# Altium PCB ROS_CAR.PcbDoc (part 10 of 13)
Units mil, origin at the board's own origin, x right, y up, seen from the top; angles counter-clockwise.
Board outline 3937.01 x 3937.01 mil, 2 copper layers (Top Layer, Bottom Layer); 201 components, 155 nets, 998 pads, 0 vias.
Unrouted connection lines stored in the file: 3.
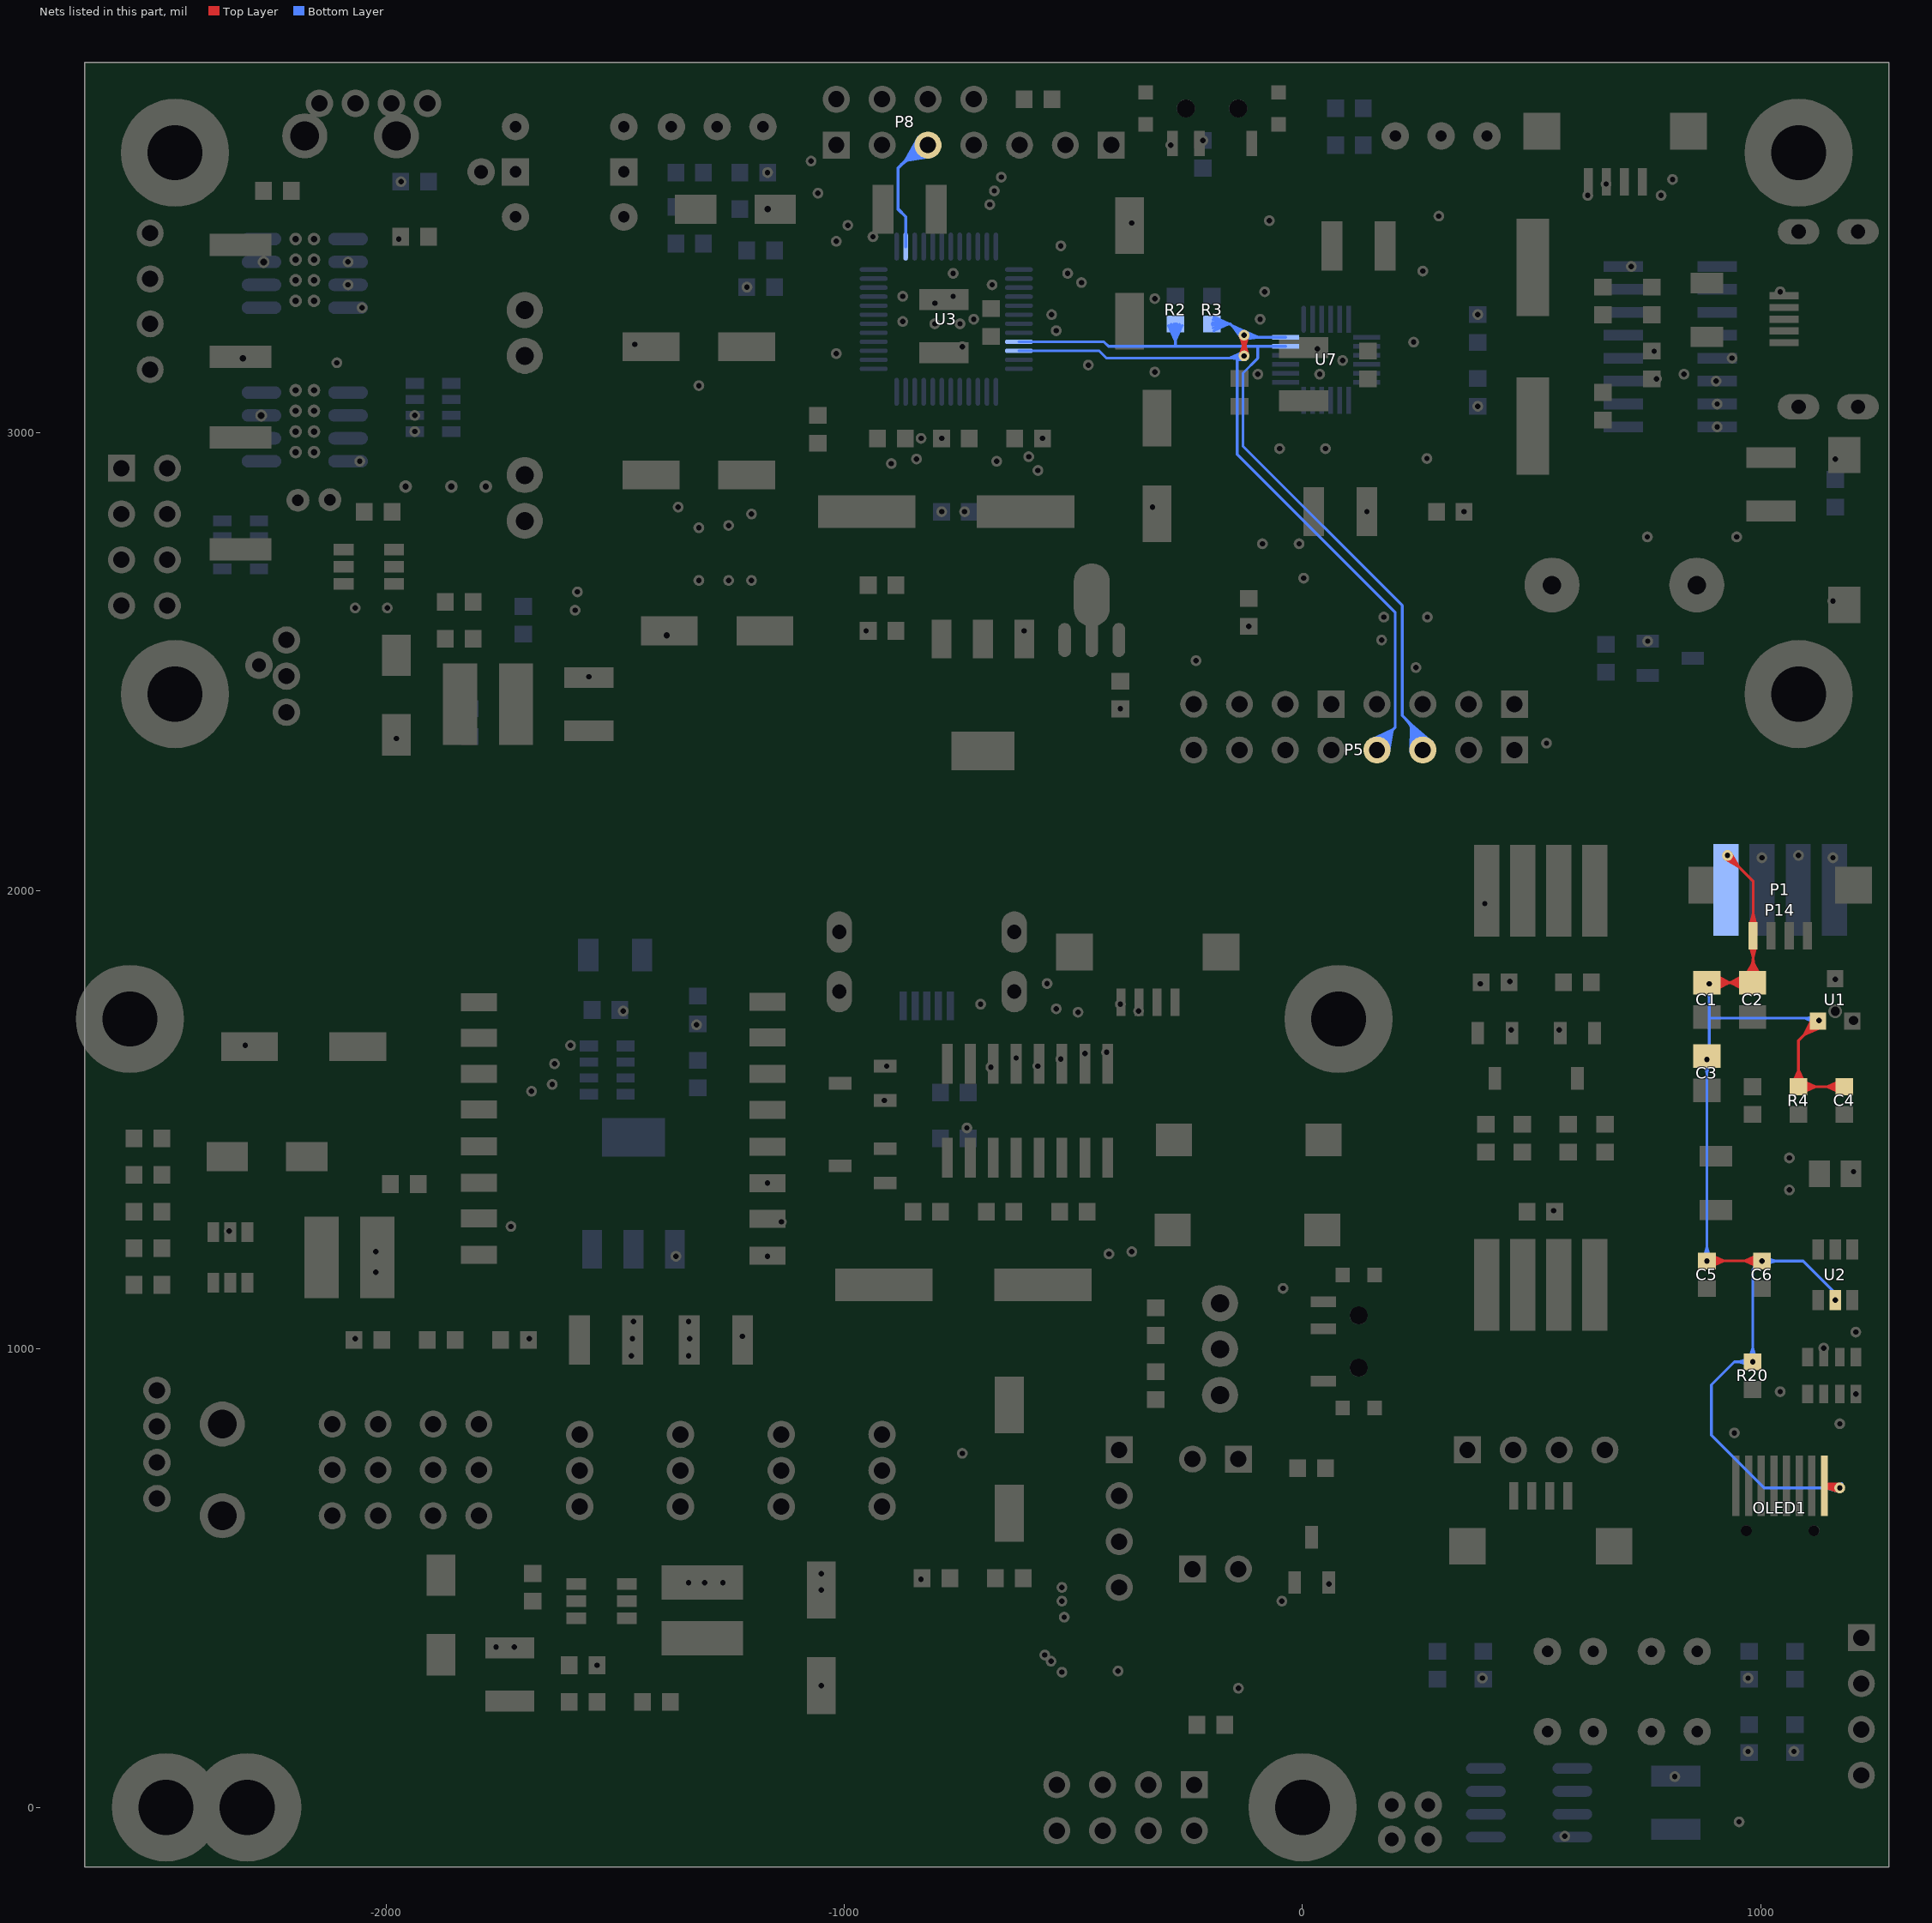
[diagram p10: the nets of this part, all layers, seen from the top]

## Nets (pads, with @x,y where several pads share a name; then routed paths per layer and width w, separated by ;. In a path a pad name is that pad's centre, name@x,y a point inside that pad or via, vN(x,y) a via of type N, cw(c..) or ccw(c..) an arc to the next point about the centre after c; other vN are vias at no path point) (continued)
S_GND: C1.2 C2.2 C3.2 C4.2 C5.1 C6.2 OLED1.8 P1.4 P14.4 pad.1@882.52,1192.09 pad.1@882.52,1632.09 pad.1@887.52,1797.09 pad.1@927.52,2077.09 pad.1@982.52,972.09 pad.1@1002.52,1192.09 pad.1@1127.52,1717.09 pad.1@1162.52,1107.09 pad.1@1172.52,697.09 R4.2 R20.1 U1.3 U2.2 | length 10742
  Top Layer w6: C1.2@879.29,1800.24 C1.2@887.74,1810 ; C1.2@879.66,1793.11 C1.2@889.61,1783.2 ; C5.1@882.52,1192.4 C6.2@1007.2,1192.4 ; C1.2@882.52,1799.49 C2.2@982.52,1799.49 ; C5.1@883.3,1200.86 915.15,1193.63 ; C5.1@883.45,1183.33 914.87,1191.1 ; C5.1@883.5,1192.4 919.81,1192.4 ; C5.1@883.53,1200.84 912.77,1193.04 ; C5.1@883.65,1189.1 919.81,1192.4 ; C5.1@883.65,1195.71 919.81,1192.4 ; C5.1@883.71,1183.36 912.65,1191.75 ; C5.1@883.91,1200.79 912.65,1191.75 ; C5.1@883.98,1200.78 914.87,1191.1 ; C5.1@884.08,1183.41 912.77,1193.04 ; C5.1@884.12,1183.42 915.15,1193.63 ; C5.1@884.7,1183.17 919.81,1192.4 ; C5.1@884.7,1201.63 919.81,1192.4 ; C1.2@886.46,1799.49 930.05,1799.49 ; C5.1@886.73,1177.44 919.81,1192.4 ; C5.1@886.73,1207.36 919.81,1192.4 ; C1.2@886.7,1794.9 930.05,1799.49 ; C1.2@886.7,1804.07 930.05,1799.49 ; C1.2@887.49,1805.9 921.54,1801.6 ; C1.2@887.74,1788.98 930.05,1799.49 ; C1.2@887.75,1805.89 918.64,1800.69 ; C1.2@887.94,1805.89 930.05,1799.49 ; C1.2@888.5,1805.84 917.48,1798.16 ; C1.2@888.67,1788.35 919.32,1796.82 ; C5.1@888.75,1185.86 cw(c904.55,1170.05) 904.55,1192.4 ; C5.1@888.75,1198.32 ccw(c903.03,1212.6) 903.03,1192.4 ; C1.2@888.81,1805.8 919.32,1796.82 ; C1.2@888.92,1788.39 930.05,1799.49 ; C1.2@889.13,1788.42 917.48,1798.16 ; C1.2@889.51,1795.1 cw(c900.1,1784.5) C1.2@900.1,1799.49 ; C1.2@889.61,1815.78 930.05,1799.49 ; C5.1@890.09,1185.82 cw(c905.97,1169.93) 905.97,1192.4 cw(c905.97,1214.87) C5.1@890.09,1198.98 ; C1.2@892.31,1777.67 930.05,1799.49 ; C1.2@892.31,1821.31 930.05,1799.49 ; C1.2@893.75,1790.86 cw(c914.59,1770.02) 914.59,1799.49 ; C1.2@893.75,1803.32 ccw(c902.99,1812.56) C1.2@902.99,1799.49 ; C5.1@894.33,1181.58 cw(c920.46,1155.45) 920.46,1192.4 cw(c920.46,1229.36) C5.1@894.33,1203.23 ; C1.2@895.85,1799.95 C1.2@887.74,1810 ; C1.2@896.2,1795.6 C1.2@889.61,1783.2 ; C1.2@898.19,1787.76 cw(c926.51,1759.44) 926.51,1799.49 cw(c926.51,1839.54) C1.2@898.19,1811.22 ; C1.2@902.43,1783.51 cw(c940.99,1744.95) 940.99,1799.49 cw(c940.99,1854.03) C1.2@902.43,1815.46 ; pad.1@922.13,2070.12 952.06,2052.55 pad.1@934.49,2082.48 ; pad.1@927.52,2068.28 cw(c927.52,2047) 942.56,2062.05 cw(c957.6,2077.09) pad.1@936.33,2077.09 ; pad.1@927.52,2077.09 983.46,2021.14 983.46,1800.43 C2.2@982.52,1799.49 ; C2.2@960.83,1805.81 983.46,1843.09 ; C2.2@962.61,1783.51 ccw(c924.04,1744.95) 924.04,1799.49 ccw(c924.04,1854.03) C2.2@962.61,1815.46 ; C2.2@966.3,1803 983.46,1843.09 ; C2.2@966.55,1815.46 ccw(c925.7,1856.31) 983.46,1856.31 ; C2.2@966.85,1787.76 ccw(c938.53,1759.44) 938.53,1799.49 ccw(c938.53,1839.54) C2.2@966.85,1811.22 ; C2.2@970.79,1811.22 ccw(c940.19,1841.82) 983.46,1841.82 ; C2.2@972.04,1801 983.46,1843.09 ; C2.2@972.73,1777.67 934.99,1799.49 ; C2.2@972.73,1821.31 934.99,1799.49 ; C2.2@975.03,1806.98 ccw(c954.67,1827.34) 983.46,1827.34 ; C2.2@975.43,1783.2 934.99,1799.49 ; C2.2@975.43,1815.78 934.99,1799.49 ; P14.4@976.67,1881.09 983.46,1854.09 ; P14.4@976.67,1923.08 983.46,1950.09 ; C2.2@977.3,1788.98 934.99,1799.49 ; C2.2@977.3,1810 934.99,1799.49 ; C2.2@977.94,1799.83 983.46,1843.09 ; C2.2@978.34,1794.9 934.99,1799.49 ; C2.2@978.34,1804.07 934.99,1799.49 ; C2.2@978.58,1799.49 934.99,1799.49 ; P14.4@978.63,1877.09 cw(c966.95,1865.41) 983.46,1865.41 cw(c999.98,1865.41) P14.4@988.3,1877.09 ; P14.4@978.63,1927.08 ccw(c966.95,1938.76) 983.46,1938.76 ccw(c999.98,1938.76) P14.4@988.3,1927.08 ; 980.49,1192.4 cw(c980.49,1170.05) C6.2@996.29,1185.86 ; 982.01,1192.4 ccw(c982.01,1212.6) C6.2@996.29,1198.32 ; 983.46,1837.26 ccw(c1020.29,1837.26) C2.2@994.25,1811.22 ; 983.46,1851.75 ccw(c1034.78,1851.75) C2.2@998.49,1815.46 ; P14.4@983.46,1881.93 983.46,1854.09 ; P14.4@983.46,1922.24 983.46,1950.09 ; C2.2@987.11,1799.63 983.46,1843.09 ; P14.4@990.26,1881.09 983.46,1854.09 ; P14.4@990.26,1923.08 983.46,1950.09 ; C6.2@990.71,1181.58 ccw(c964.58,1155.45) 964.58,1192.4 ccw(c964.58,1229.36) C6.2@990.71,1203.23 ; C2.2@993.06,1800.55 983.46,1843.09 ; C6.2@994.95,1185.82 ccw(c979.07,1169.93) 979.07,1192.4 ccw(c979.07,1214.87) C6.2@994.95,1198.98 ; C6.2@998.31,1177.44 965.23,1192.4 ; C6.2@998.31,1207.36 965.23,1192.4 ; C2.2@998.87,1802.29 983.46,1843.09 ; C6.2@1000.34,1183.17 965.23,1192.4 ; C6.2@1000.34,1201.63 965.23,1192.4 ; C6.2@1000.92,1183.42 969.89,1193.63 ; C6.2@1000.96,1183.41 972.26,1193.04 ; C6.2@1001.06,1200.78 970.17,1191.1 ; C6.2@1001.13,1200.79 972.39,1191.75 ; C6.2@1001.33,1183.36 972.39,1191.75 ; C6.2@1001.38,1189.1 965.23,1192.4 ; C6.2@1001.38,1195.71 965.23,1192.4 ; C6.2@1001.54,1192.4 965.23,1192.4 ; C6.2@1001.51,1200.84 972.26,1193.04 ; C6.2@1001.59,1183.33 970.17,1191.1 ; C6.2@1001.74,1200.86 969.89,1193.63 ; C2.2@1004.46,1804.86 983.46,1843.09 ; R4.2@1067.56,1575.63 1082.52,1608.71 ; R4.2@1071.7,1583.23 ccw(c1045.57,1609.36) 1082.52,1609.36 ccw(c1119.47,1609.36) R4.2@1093.34,1583.23 ; R4.2@1073.29,1573.59 1082.52,1608.71 ; R4.2@1075.94,1578.98 ccw(c1060.05,1594.87) 1082.52,1594.87 ccw(c1104.99,1594.87) R4.2@1089.1,1578.98 ; R4.2@1079.22,1572.55 1082.52,1608.71 ; R4.2@1083.5,1572.4 1119.81,1572.4 ; R4.2@1083.65,1569.1 1119.81,1572.4 ; R4.2@1083.65,1575.71 1119.81,1572.4 ; R4.2@1084.7,1563.17 1119.81,1572.4 ; R4.2@1084.7,1581.63 1119.81,1572.4 ; R4.2@1085.82,1572.55 1082.52,1608.71 ; R4.2@1086.73,1557.44 1119.81,1572.4 ; R4.2@1086.73,1587.36 1119.81,1572.4 ; R4.2@1090.09,1565.82 cw(c1105.97,1549.93) 1105.97,1572.4 cw(c1105.97,1594.87) R4.2@1090.09,1578.98 ; R4.2@1091.75,1573.59 1082.52,1608.71 ; R4.2@1094.33,1561.58 cw(c1120.46,1535.45) 1120.46,1572.4 cw(c1120.46,1609.36) R4.2@1094.33,1583.23 ; R4.2@1097.48,1575.63 1082.52,1608.71 ; 1098.31,1689.02 cw(c1125.12,1662.22) U1.3@1125.12,1700.13 ; 1100.69,1691.4 ccw(c1077.25,1714.84) U1.3@1110.4,1714.84 ; U1.3@1108.56,1699.27 cw(c1125.12,1682.71) U1.3@1125.12,1706.13 ; U1.3@1110.53,1701.24 cw(c1127.52,1684.25) U1.3@1127.52,1708.28 ; U1.3@1110.93,1701.64 ccw(c1097.73,1714.84) U1.3@1116.4,1714.84 ; U1.3@1113.2,1723.48 1094.67,1685.38 ; U1.3@1113.29,1704 ccw(c1100.19,1717.09) U1.3@1118.71,1717.09 ; U1.3@1118.44,1720.45 1094.67,1685.38 ; U1.3@1120.4,1722.28 1102.62,1690.39 ; U1.3@1120.64,1722.59 1102.75,1693.2 ; U1.3@1120.67,1722.63 1102.55,1693.26 ; U1.3@1120.98,1722.99 1099.92,1693.12 ; U1.3@1125.12,1714.84 1094.67,1685.38 ; U1.3@1125.12,1715.83 1082.52,1673.23 R4.2@1082.52,1572.4 C4.2@1182.52,1572.4 ; U1.3@1130.5,1707.99 1094.67,1685.38 ; U1.3@1132.45,1709.79 1099.92,1693.12 ; U1.3@1132.74,1709.99 1102.55,1693.26 ; U1.3@1132.77,1710.01 1102.75,1693.2 ; U1.3@1133.19,1710.34 1102.62,1690.39 ; U1.3@1133.36,1702.65 1094.67,1685.38 ; OLED1.8@1138.18,701.29 ccw(c1148.33,711.44) 1148.33,697.09 ; OLED1.8@1138.53,697.23 pad.1@1166.76,697.09 ; OLED1.8@1138.98,702.09 pad.1@1166.76,697.09 ; OLED1.8@1140.25,706.79 pad.1@1166.76,697.09 ; OLED1.8@1142.42,705.53 ccw(c1162.81,725.92) pad.1@1162.81,697.09 ; pad.1@1166.29,690.86 ccw(c1151.25,675.82) 1151.25,697.09 ccw(c1151.25,718.36) pad.1@1166.29,703.32 ; pad.1@1168.84,689.08 OLED1.8@1143.27,705.69 ; pad.1@1169.99,688.65 OLED1.8@1142.84,701.39 ; C4.2@1170.71,1561.58 ccw(c1144.58,1535.45) 1144.58,1572.4 ccw(c1144.58,1609.36) C4.2@1170.71,1583.23 ; pad.1@1171.16,705.79 OLED1.8@1143.98,697.09 ; pad.1@1171.25,705.81 OLED1.8@1142.71,697.21 ; pad.1@1172.49,705.9 OLED1.8@1142.84,701.39 ; pad.1@1173.76,705.81 OLED1.8@1143.27,705.69 ; C4.2@1174.95,1565.82 ccw(c1159.07,1549.93) 1159.07,1572.4 ccw(c1159.07,1594.87) C4.2@1174.95,1578.98 ; C4.2@1178.31,1557.44 1145.23,1572.4 ; C4.2@1178.31,1587.36 1145.23,1572.4 ; C4.2@1180.34,1563.17 1145.23,1572.4 ; C4.2@1180.34,1581.63 1145.23,1572.4 ; C4.2@1181.38,1569.1 1145.23,1572.4 ; C4.2@1181.38,1575.71 1145.23,1572.4 ; C4.2@1181.54,1572.4 1145.23,1572.4 ; pad.1@882.52,1192.09 914.87,1191.1 ; pad.1@882.52,1192.09 912.65,1191.75 ; pad.1@882.52,1192.09 912.33,1192.4 ; pad.1@882.52,1192.09 912.77,1193.04 ; pad.1@882.52,1192.09 915.15,1193.63 ; pad.1@882.52,1192.09 912.33,1192.4 ; pad.1@887.52,1797.09 918.64,1800.69 ; pad.1@887.52,1797.09 C1.2@887.74,1810 ; pad.1@887.52,1797.09 921.54,1801.6 ; pad.1@887.52,1797.09 917.45,1799.49 ; pad.1@887.52,1797.09 917.48,1798.16 ; pad.1@887.52,1797.09 C1.2@889.61,1783.2 ; pad.1@887.52,1797.09 930.05,1799.49 ; pad.1@887.52,1797.09 919.32,1796.82 ; pad.1@887.52,1797.09 917.46,1799.49 ; C1.2@887.74,1810 930.05,1799.49 ; C1.2@889.61,1783.2 930.05,1799.49 ; 912.33,1192.4 883.91,1183.39 912.33,1192.4 ; 912.33,1192.4 883.73,1200.81 912.33,1192.4 ; 917.45,1799.49 889.51,1788.5 917.46,1799.49 ; 917.45,1799.49 888.11,1805.88 917.46,1799.49 ; 918.64,1800.69 889.75,1788.56 921.54,1801.6 ; 969.89,1193.63 pad.1@1002.52,1192.09 ; 970.17,1191.1 pad.1@1002.52,1192.09 ; 972.26,1193.04 pad.1@1002.52,1192.09 ; 972.39,1191.75 pad.1@1002.52,1192.09 ; 972.71,1192.4 pad.1@1002.52,1192.09 ; 972.71,1192.4 1001.31,1200.81 972.71,1192.4 ; 972.71,1192.4 1001.13,1183.39 972.71,1192.4 ; 972.71,1192.4 pad.1@1002.52,1192.09 ; C2.2@982.52,1799.49 983.46,1843.09 ; 1099.92,1693.12 pad.1@1127.52,1717.09 ; 1102.55,1693.26 pad.1@1127.52,1717.09 ; 1102.62,1690.39 pad.1@1127.52,1717.09 ; 1102.75,1693.2 pad.1@1127.52,1717.09 ; OLED1.8@1142.71,697.21 pad.1@1172.52,697.09 ; OLED1.8@1142.71,697.21 1171.18,688.38 OLED1.8@1143.98,697.09 ; OLED1.8@1142.84,701.39 pad.1@1172.52,697.09 ; OLED1.8@1143.27,705.69 pad.1@1172.52,697.09 ; OLED1.8@1143.98,697.09 pad.1@1172.52,697.09
  Bottom Layer w6: pad.1@873.81,1193.39 882.52,1221.9 ; pad.1@873.81,1630.78 882.52,1602.28 pad.1@891.23,1630.78 ; pad.1@874.1,1634.68 887.52,1663.32 ; pad.1@876.29,1198.32 ccw(c861.25,1213.36) 882.52,1213.36 ccw(c903.79,1213.36) pad.1@888.75,1198.32 ; pad.1@876.29,1625.86 cw(c861.25,1610.82) 882.52,1610.82 cw(c903.79,1610.82) pad.1@888.75,1625.86 ; pad.1@876.29,1638.32 ccw(c849.18,1665.43) 887.52,1665.43 ; pad.1@878.81,1795.78 887.52,1767.28 ; pad.1@880.53,1634.07 ccw(c863.66,1650.94) 887.52,1650.94 ; pad.1@881.29,1790.86 cw(c866.25,1775.82) 887.52,1775.82 cw(c908.79,1775.82) pad.1@893.75,1790.86 ; pad.1@882.52,1192.09 882.52,1221.9 ; pad.1@882.52,1192.4 pad.1@882.52,1632.09 ; 887.52,1722.09 1122.52,1722.09 pad.1@1127.52,1717.09 1096.21,1722.09 ; pad.1@887.52,1787.09 887.52,1637.09 pad.1@882.52,1632.09 ; pad.1@887.52,1797.09 887.52,1767.28 ; pad.1@891.23,1193.39 882.52,1221.9 ; pad.1@891.33,1631.92 887.52,1663.32 ; pad.1@896.23,1795.78 887.52,1767.28 ; pad.1@973.81,973.39 982.52,1001.9 pad.1@991.23,973.39 ; pad.1@976.29,965.86 ccw(c961.25,950.82) 961.25,972.09 ccw(c961.25,993.36) 976.29,978.32 ccw(c961.25,993.36) 982.52,993.36 ccw(c1003.79,993.36) pad.1@988.75,978.32 ; pad.1@981.22,963.37 952.71,972.09 ; pad.1@981.22,980.8 952.71,972.09 ; pad.1@993.71,1192.09 cw(c972.44,1192.09) 987.48,1177.05 cw(c1002.52,1162) pad.1@1002.52,1183.28 ; pad.1@995.39,1197.27 982.52,1172.09 ; pad.1@1003.82,1183.37 1032.33,1192.09 pad.1@1003.82,1200.8 ; pad.1@1007.7,1184.96 982.52,1172.09 ; pad.1@1008.75,1185.86 cw(c1023.79,1170.82) 1023.79,1192.09 cw(c1023.79,1213.36) pad.1@1008.75,1198.32 ; 1094.18,1722.09 cw(c1094.18,1683.74) pad.1@1121.29,1710.86 ; 1108.66,1722.09 cw(c1108.66,1698.23) pad.1@1125.53,1715.1 ; pad.1@1124.93,1708.66 1096.21,1722.09 ; pad.1@1127.69,1725.9 1096.21,1722.09 ; pad.1@1154.1,1109.67 1162.52,1122.09 ; pad.1@1158.23,1114.78 ccw(c1154.16,1122.09) 1162.52,1122.09 ; pad.1@1162.52,1107.09 1162.52,1122.09 ; pad.1@1166.29,690.86 ccw(c1151.25,675.82) 1151.25,697.09 ccw(c1151.25,718.36) pad.1@1166.29,703.32 ; pad.1@1166.81,1114.78 cw(c1170.88,1122.09) 1162.52,1122.09 ; pad.1@1170.94,1109.67 1162.52,1122.09 ; pad.1@1171.22,688.37 1142.71,697.09 ; pad.1@1171.22,705.8 1142.71,697.09 ; pad.1@1172.52,697.09 1142.71,697.09 ; pad.1@1177.52,707.09 1167.52,697.09 1007.52,697.09 892.52,812.09 892.52,922.09 942.52,972.09 pad.1@982.52,972.09 ; pad.1@882.52,1632.09 887.52,1663.32 ; 952.71,972.09 pad.1@982.52,972.09 ; pad.1@982.52,972.09 982.52,1172.09 ; 982.52,1172.09 pad.1@1002.52,1192.09 1092.52,1192.09 1162.52,1122.09
SCK: P8.5 U3.26 | length 1000.3
  Bottom Layer w7: -875.57,3584 cw(c-817.48,3525.91) P8.5@-817.48,3608.06 ; U3.26@-866.06,3405.55 -866.06,3470.67 -882.48,3487.09 -882.48,3577.09 -832.48,3627.09 P8.5@-817.48,3627.09 -866.39,3593.17 ; U3.26@-866.06,3431.14 -866.06,3457.06 ; -863.62,3595.95 cw(c-817.48,3549.81) P8.5@-817.48,3615.06 ; -851.67,3607.9 cw(c-817.48,3573.71) P8.5@-817.48,3622.06 ; -851.31,3608.26 ccw(c-870.13,3627.09) P8.5@-843.51,3627.09 ; P8.5@-836.63,3644.72 -866.39,3593.17 ; P8.5@-830.68,3640.79 -866.39,3593.17 ; P8.5@-825.3,3636.23 -866.39,3593.17 ; P8.5@-820.52,3631.09 -866.39,3593.17 ; P8.5@-814.79,3622.84 -866.39,3593.17 ; P8.5@-811.66,3616.56 -866.39,3593.17 ; P8.5@-809.28,3609.92 -866.39,3593.17 ; P8.5@-807.69,3602.97 -866.39,3593.17
SCL: P5.3 R2.2 U3.45 U7.23 | length 2883.2
  Bottom Layer w6: U3.45@-619.02,3197.87 -433.27,3197.87 -423.43,3188.03 U7.23@-36.85,3188.03 ; U3.45@-593.43,3197.87 -570.5,3197.87 ; R2.2@-292.44,3233.54 -277.48,3200.46 ; R2.2@-288.3,3225.95 cw(c-314.43,3199.82) -277.48,3199.82 cw(c-240.53,3199.82) R2.2@-266.66,3225.95 ; R2.2@-286.71,3235.58 -277.48,3200.46 ; R2.2@-284.06,3230.19 cw(c-299.95,3214.3) -277.48,3214.3 cw(c-255.01,3214.3) R2.2@-270.9,3230.19 ; R2.2@-280.78,3236.62 -277.48,3200.46 ; -277.48,3188.03 R2.2@-277.48,3236.77 ; R2.2@-274.18,3236.62 -277.48,3200.46 ; R2.2@-268.25,3235.58 -277.48,3200.46 ; R2.2@-262.52,3233.54 -277.48,3200.46 ; -97.48,3188.03 -97.48,3162.09 -130,3129.57 -130,2970 217.52,2622.48 217.52,2382.09 262.52,2337.09 P5.3@262.52,2307.09 237.26,2362.35 ; -84.38,3188.03 U7.23@-61.46,3188.03 ; 221.37,2378.23 cw(c156.65,2313.5) P5.3@248.02,2307.97 ; 230.8,2368.81 cw(c174.42,2312.43) P5.3@254.01,2307.6 ; P5.3@236.57,2301.59 237.26,2362.35 ; 240.23,2359.38 cw(c192.19,2311.35) P5.3@260,2307.24 ; P5.3@242.68,2301.83 237.26,2362.35 ; P5.3@248.68,2302.67 237.26,2362.35 ; 249.65,2349.96 cw(c209.97,2310.27) P5.3@265.99,2306.88 ; P5.3@254.53,2304.09 237.26,2362.35 ; 259.08,2340.53 cw(c227.74,2309.19) P5.3@271.97,2306.51 ; P5.3@270.01,2311.17 237.26,2362.35 ; P5.3@274.92,2314.66 237.26,2362.35 ; P5.3@279.48,2318.65 237.26,2362.35 ; P5.3@283.66,2323.12 237.26,2362.35
SDA: P5.4 pad.1@-127.48,3167.09 pad.1@-127.48,3212.09 R3.2 U3.46 U7.24 | length 3547.3
  Top Layer w6: pad.1@-136.19,3168.39 -127.48,3196.9 ; pad.1@-136.19,3210.78 -127.48,3182.28 pad.1@-118.77,3210.78 ; pad.1@-133.71,3173.32 ccw(c-148.75,3188.36) -127.48,3188.36 ccw(c-106.21,3188.36) pad.1@-121.25,3173.32 ; pad.1@-133.71,3205.86 cw(c-148.75,3190.82) -127.48,3190.82 cw(c-106.21,3190.82) pad.1@-121.25,3205.86 ; pad.1@-127.48,3167.09 -127.48,3196.9 ; pad.1@-127.48,3172.09 pad.1@-127.48,3212.09 ; pad.1@-118.77,3168.39 -127.48,3196.9
  Bottom Layer w6: U3.46@-619.02,3178.19 -443.58,3178.19 -427.48,3162.09 -132.48,3162.09 -142.48,3157.94 ; U3.46@-593.43,3178.19 -570.5,3178.19 ; R3.2@-197.48,3236.77 -157.17,3236.77 -128.11,3207.72 U7.24@-36.85,3207.72 ; R3.2@-196.5,3236.77 -160.19,3236.77 ; R3.2@-196.35,3233.47 -160.19,3236.77 ; R3.2@-196.35,3240.08 -160.19,3236.77 ; R3.2@-195.3,3227.54 -160.19,3236.77 ; R3.2@-195.3,3246 -160.19,3236.77 ; R3.2@-193.27,3221.81 -160.19,3236.77 ; R3.2@-193.27,3251.73 -160.19,3236.77 ; R3.2@-189.91,3230.19 cw(c-174.03,3214.3) -174.03,3236.77 cw(c-174.03,3259.24) R3.2@-189.91,3243.35 ; R3.2@-185.67,3225.95 cw(c-159.54,3199.82) -159.54,3236.77 cw(c-159.54,3273.73) R3.2@-185.67,3247.6 ; -160.82,3162.09 ccw(c-160.82,3200.43) pad.1@-133.71,3173.32 ; -151.06,3230.66 ccw(c-127.48,3254.24) pad.1@-127.48,3220.9 ; -146.34,3162.09 ccw(c-146.34,3185.94) pad.1@-129.47,3169.07 ; -141.44,3158.37 ccw(c-144.66,3166.13) pad.1@-136.28,3166.59 ; -140.81,3220.42 ccw(c-127.48,3233.76) pad.1@-127.48,3214.9 ; -140.06,3158.95 cw(c-135.46,3147.83) pad.1@-130.85,3158.95 ; -138.99,3218.59 cw(c-145.49,3212.09) pad.1@-136.29,3212.09 ; pad.1@-133.87,3206.02 -153.61,3233.22 ; pad.1@-133.81,3173.22 -142.48,3157.94 ; pad.1@-130.06,3175.51 -158.81,3162.09 ; pad.1@-127.47,3203.28 -97.1,3207.72 ; pad.1@-127.31,3158.28 -158.81,3162.09 ; pad.1@-125.49,3214.07 ccw(c-110.14,3229.42) -110.14,3207.72 ; pad.1@-124.99,3220.54 -97.1,3207.72 ; pad.1@-124.93,3158.65 -142.48,3157.94 ; pad.1@-122.89,3219.61 -153.61,3233.22 ; pad.1@-121.25,3218.32 ccw(c-95.66,3243.91) -95.66,3207.72 ; -84.38,3207.72 U7.24@-61.46,3207.72 ; P5.4@145.98,2327.83 196.92,2351.49 ; P5.4@148.86,2322.41 196.92,2351.49 ; P5.4@152.28,2317.39 196.92,2351.49 ; P5.4@156.19,2312.81 196.92,2351.49 ; P5.4@162.52,2327.61 ccw(c162.52,2353.03) 180.49,2335.06 ; P5.4@162.52,2333.61 ccw(c162.52,2373.51) 190.73,2345.3 ; P5.4@169.64,2302.39 196.92,2351.49 ; P5.4@170.9,2308.66 cw(c197.68,2313.71) 178.41,2332.98 ; P5.4@175.06,2299.75 196.92,2351.49 ; P5.4@176.8,2309.78 cw(c211.2,2316.26) 186.45,2341.01 ; P5.4@180.77,2297.69 196.92,2351.49 ; P5.4@182.69,2310.89 cw(c224.73,2318.8) 194.48,2349.05 ; P5.4@186.73,2296.25 196.92,2351.49 ; P5.4@188.59,2312 cw(c238.25,2321.35) 202.52,2357.08 ; -158.81,3162.09 pad.1@-127.48,3167.09 -142.48,3157.94 ; -153.61,3233.22 pad.1@-127.48,3212.09 -97.1,3207.72 ; -142.48,3157.94 -142.48,2952.09 202.52,2607.09 202.52,2357.09 ; 196.92,2351.49 P5.4@162.52,2307.09 162.52,2317.09 202.52,2357.09